# Allegro board GALVO_CTRL.brd
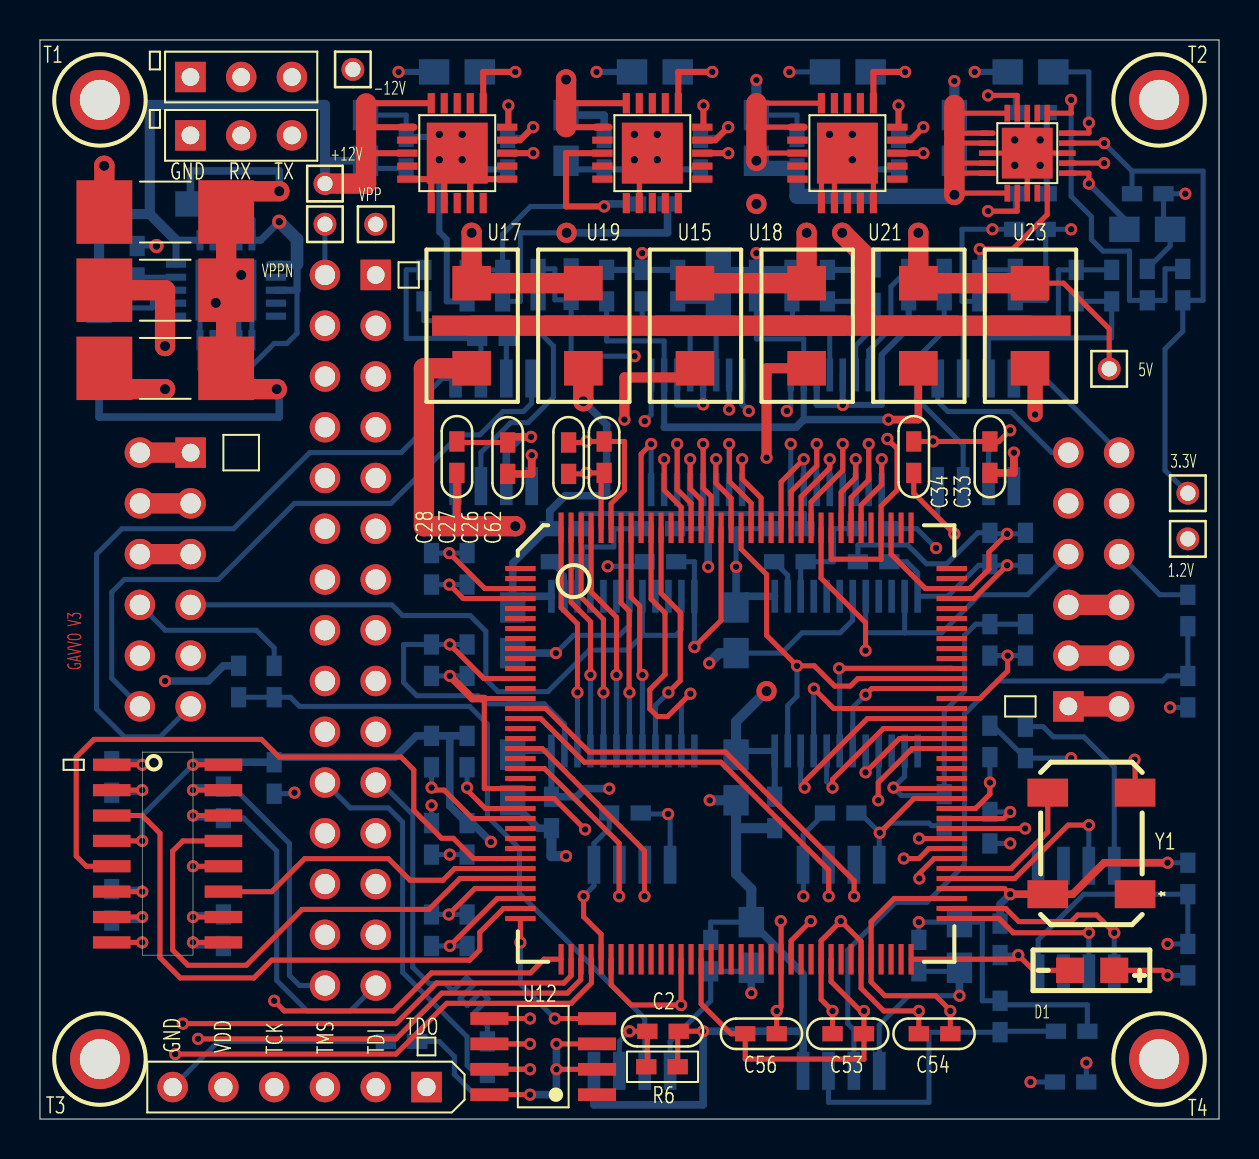
[diagram p0: board, top side]
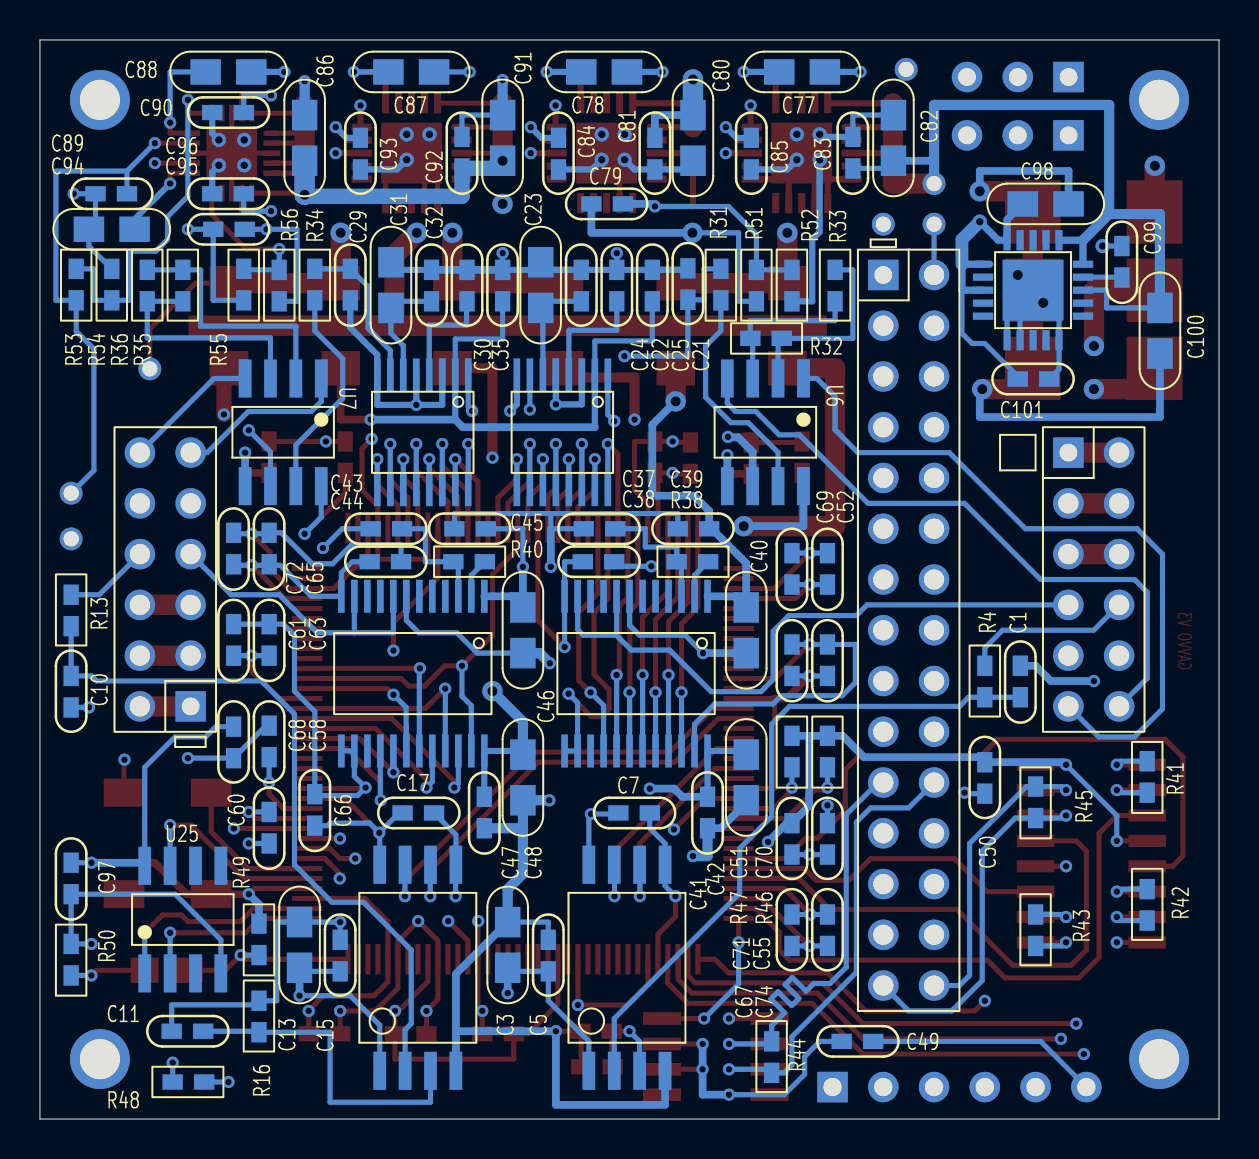
[diagram p1: board, bottom side, seen from below]

Outline 59 x 54 mm; copper layers: TOP, LAYER2, LAYER3, LAYER4, LAYER5, BOTTOM. Coordinates in mm from the lower left corner of the outline.
Outline path: 0,54 59,54 59,0 0,0 0,54

## Placement (name value [footprint] x y rotation side)
C1  220pF  [0603C]  9.94 21.11 90 bottom
C2  220pF  [0603C]  30.39 4.39 0 top
C3  10uF  [0805C]  35.6 9.85 270 bottom
C5  1nF  [0603C]  33.56 8.97 270 bottom
C7  0.1uF  [0603C]  28.48 15.32 0 bottom
C10  220pF  [0603C]  57.44 22.17 270 bottom
C11  220pF  [0603C]  50.84 4.39 0 bottom
C13  10uF  [0805C]  46.01 9.85 270 bottom
C15  1nF  [0603C]  43.98 8.97 270 bottom
C17  0.1uF  [0603C]  39.28 15.32 0 bottom
C21  220pF  [0603C]  26.58 42.57 270 bottom
C22  4.7uF  [0603C]  30.13 42.49 270 bottom
C23  10uF  [0805C]  33.94 42.87 270 bottom
C24  1uF  [0603C]  31.91 42.49 270 bottom
C25  0.1uF  [0603C]  28.36 42.49 270 bottom
C26  0.1uF  [0603C]  26.45 33.86 270 top
C27  0.1uF  [0603C]  23.4 33.86 270 top
C28  0.1uF  [0603C]  20.86 33.91 270 top
C29  220pF  [0603C]  43.47 40.97 90 bottom
C30  4.7uF  [0603C]  37.63 42.49 270 bottom
C31  10uF  [0805C]  41.44 42.87 270 bottom
C32  1uF  [0603C]  39.41 42.49 270 bottom
C33  0.1uF  [0603C]  47.53 33.91 270 top
C34  0.1uF  [0603C]  43.72 33.91 270 top
C35  0.1uF  [0603C]  35.85 42.49 270 bottom
C37  1uF  [0603C]  31.79 29.54 180 bottom
C38  0.1uF  [0603C]  30.26 27.89 0 bottom
C39  0.1uF  [0603C]  27.09 29.54 180 bottom
C40  10uF  [0805C]  23.66 23.32 90 bottom
C41  0.1uF  [0603C]  25.6 14.55 90 bottom
C42  10uF  [0805C]  23.66 15.95 90 bottom
C43  1uF  [0603C]  42.45 29.54 180 bottom
C44  0.1uF  [0603C]  40.93 27.89 0 bottom
C45  0.1uF  [0603C]  38.26 29.54 180 bottom
C46  10uF  [0805C]  34.83 23.32 90 bottom
C47  0.1uF  [0603C]  36.77 14.55 90 bottom
C48  10uF  [0805C]  34.83 15.95 90 bottom
C49  0.1uF  [0603C]  17.31 3.89 0 bottom
C50  0.1uF  [0603C]  11.72 17.86 270 bottom
C51  0.1uF  [0603C]  19.59 22.17 90 bottom
C52  0.1uF  [0603C]  19.59 26.75 90 bottom
C53  0.1uF  [0603C]  39.66 4.27 0 top
C54  0.1uF  [0603C]  43.98 4.27 0 top
C55  0.1uF  [0603C]  19.59 14.81 270 bottom
C56  0.1uF  [0603C]  36.87 4.27 180 top
C58  0.1uF  [0603C]  47.53 18.11 90 bottom
C60  0.1uF  [0603C]  47.53 13.79 90 bottom
C61  0.1uF  [0603C]  49.31 23.19 90 bottom
C62  0.1uF  [0603C]  28.23 32.33 90 top
C63  0.1uF  [0603C]  47.53 23.19 90 bottom
C65  0.1uF  [0603C]  47.53 27.76 90 bottom
C66  0.1uF  [0603C]  45.25 14.68 90 bottom
C67  0.1uF  [0603C]  21.37 10.24 270 bottom
C68  0.1uF  [0603C]  49.31 19.63 270 bottom
C69  0.1uF  [0603C]  21.37 26.75 90 bottom
C70  0.1uF  [0603C]  21.37 22.17 90 bottom
C71  0.1uF  [0603C]  21.37 14.81 270 bottom
C72  0.1uF  [0603C]  49.31 27.76 90 bottom
C74  0.1uF  [0603C]  19.59 10.24 270 bottom
C77  10uF  [0805C]  22.01 52.4 180 bottom
C78  10uF  [0805C]  31.91 52.4 180 bottom
C79  10nF  [0603C]  31.4 45.8 180 bottom
C80  47uF  [0805C]  26.32 50.24 270 bottom
C81  0.1uF  [0603C]  28.23 49.1 270 bottom
C82  47uF  [0805C]  16.29 47.95 90 bottom
C83  0.1uF  [0603C]  18.32 47.57 90 bottom
C84  1uF  [0603C]  33.06 49.1 270 bottom
C85  1uF  [0603C]  23.4 49.1 270 bottom
C86  10uF  [0805C]  45.76 47.95 90 bottom
C87  10uF  [0805C]  41.56 52.4 180 bottom
C88  47uF  [0805C]  50.71 52.4 180 bottom
C89  0.1uF  [0603C]  54.65 46.3 0 bottom
C90  1uF  [0603C]  48.8 50.37 0 bottom
C91  47uF  [0805C]  35.85 47.95 90 bottom
C92  0.1uF  [0603C]  37.88 47.57 90 bottom
C93  1uF  [0603C]  42.96 49.1 270 bottom
C94  47uF  [0805C]  54.26 44.53 0 bottom
C95  0.1uF  [0603C]  50.33 44.53 180 bottom
C96  1uF  [0603C]  48.8 46.3 0 bottom
C97  0.1uF  [0603C]  57.44 11.25 90 bottom
C98  47uF  [0805C]  9.81 45.8 180 bottom
C99  1uF  [0603C]  4.86 42.11 90 bottom
C100  10uF  [0805C]  2.96 40.59 270 bottom
C101  0.1uF  [0603C]  10.07 37.03 180 bottom
D1  LED  [SMD_LED]  53.76 7.44 180 top
J1  X_DRV_IF  [IDC12]  6.27 25.73 180 bottom
J2  Y_DRV_IF  [IDC12]  52.73 28.27 0 bottom
J3  HEADER 15X2  [IDC30]  15.53 18.11 180 bottom
J4  CON6  [SIP6]  19.34 1.6 270 top
J5  UART1  [SIP3]  10.07 52.15 90 top
J6  UART2  [SIP3]  10.07 49.22 90 top
L1  FB  [2412]  6.27 45.39 180 top
L2  FB  [2412]  6.27 41.48 180 top
L3  FB  [2412]  6.27 37.57 180 top
R4  10  [0603R]  11.72 22.68 270 bottom
R6  10  [0603R]  31.91 2.62 180 top
R13  10  [0603R]  57.44 26.24 270 bottom
R16  10  [0603R]  48.04 5.92 270 bottom
R31  100  [0603R]  24.93 40.97 90 bottom
R32  220  [0603R]  21.88 39.06 0 bottom
R33  NC  [0603R]  19.21 42.49 270 bottom
R34  100  [0603R]  45.25 40.97 90 bottom
R35  220  [0603R]  51.85 42.49 270 bottom
R36  NC  [0603R]  53.63 42.49 270 bottom
R38  100K  [0603R]  25.56 27.89 0 bottom
R40  100K  [0603R]  36.74 27.89 0 bottom
R41  100  [0603R]  3.59 16.33 90 bottom
R42  100  [0603R]  3.59 11.51 270 bottom
R43  100  [0603R]  9.18 10.24 270 bottom
R44  120  [0603R]  22.39 3.89 270 bottom
R45  100  [0603R]  9.18 15.06 90 bottom
R46  4.7K  [0603R]  19.59 17.6 90 bottom
R47  4.7K  [0603R]  21.37 17.6 90 bottom
R48  4.7K  [0603R]  52.36 1.85 180 bottom
R49  4.7K  [0603R]  48.04 8.2 90 bottom
R50  1K  [0603R]  57.44 7.19 90 bottom
R51  1.5M  [0603R]  23.15 42.49 270 bottom
R52  162K  [0603R]  21.37 42.49 270 bottom
R53  3.57K  [0603R]  57.19 40.97 90 bottom
R54  1.15K  [0603R]  55.41 40.97 90 bottom
R55  5.9K  [0603R]  48.8 40.97 90 bottom
R56  11.8K  [0603R]  47.03 42.49 270 bottom
T1  HOLE  [HOLE_D2MM]  3 51 0 top
T2  HOLE  [HOLE_D2MM]  56 51 0 top
T3  HOLE  [HOLE_D2MM]  3 3 0 top
T4  HOLE  [HOLE_D2MM]  56 3 0 top
TP1  VDDPIN  [TP]  16.8 44.78 0 top
TP2  VCCN_IN  [TP]  14.26 44.78 0 top
TP3  VAA12VP  [TP]  14.26 46.81 0 top
TP4  VCC12VN  [TP]  15.66 52.53 0 top
TP5  VDD3V3  [TP]  57.44 31.32 0 top
TP6  VCC5V  [TP]  53.5 37.54 0 top
TP7  VDD1V2  [TP]  57.44 29.03 0 top
U2  AD7403-8  [SO8_IC]  29.63 7.57 90 bottom
U3  AD7403-8  [SO8_IC]  40.09 7.57 90 bottom
U5  ADS8685IPW  [TSSOP16]  32.86 34.37 270 bottom
U6  AD8421ARZ  [SO8]  22.7 34.37 270 bottom
U7  AD8421  [SO8]  46.83 34.37 270 bottom
U8  ADS8685IPW  [TSSOP16]  39.84 34.37 270 bottom
U9  DAC7731E  [TSSOP24]  29.17 22.29 270 bottom
U10  DAC7731E  [TSSOP24]  40.34 22.29 270 bottom
U11  AM26LV32E  [SO16]  6.39 13.28 0 top
U12  MAX3485ESA  [SO8]  25.18 3.12 180 top
U13  LFXP2-8E-T144  [TQFP144]  34.83 18.79 0 top
U14  TPS7A4700  [VQFN20]  20.88 48.34 0 top
U15  ELKE103FA  [ELKE]  32.8 39.7 270 top
U16  TPS7A33  [VQFN20]  30.64 48.34 0 top
U17  ELKE103FA  [ELKE]  21.63 39.7 270 top
U18  ELKE103FA  [ELKE]  38.39 39.7 270 top
U19  ELKE103FA  [ELKE]  27.21 39.7 270 top
U20  TPS7A4700  [VQFN20]  40.4 48.34 0 top
U21  ELKE103FA  [ELKE]  43.98 39.7 270 top
U22  TPS7A88  [WQFN20]  49.4 48.34 0 top
U23  ELKE103FA  [ELKE]  49.57 39.7 270 top
U25  LM74CIM-3  [SO8]  51.85 9.98 90 bottom
U26  TPS7A4700  [VQFN20]  9.31 41.48 180 bottom
Y1  OSC4_20M  [XTAL_1]  52.61 13.79 90 top

## Library data of the parts
C1-C3 C5 C7 C10 C11 C13 C15 C17 C21-C35 C37-C48 C97 = CAP NP
C49-C56 C58 C60-C63 C65-C72 C74 C77-C96 C98-C101 = C
D1 = LED
J1 J2 = HEADER 6X2
J3 = HEADER 15X2
J4 = CON6: User Part Number: ***
J5 J6 = CON3
L1-L3 = INDUCTOR
R4 R6 R13 R16 R31-R36 R38 R40-R56 = R
T1-T4 TP1-TP7 = CON1
U2 U3 = AD7403
U5 U8 = ADS8685IPW: Tolerance: ***; User Part Number: ***
U6 U7 = AD8421
U9 U10 = DAC7731E: User Part Number: ***; Tolerance: ***
U11 = AM26C32
U12 = MAX3485ESA
U13 = LFXP2-8E-T144/TN144
U14 U20 U26 = TPS7A4700
U15 U17-U19 U21 U23 = ELKE103FA
U16 = TPS4A33
U22 = TPS7A88
U25 = LM74CIM-3
Y1 = OSC4/SM_0

## Footprints (pads in the part's own frame, mm; a bottom-side part is the same pattern mirrored in y, then rotated)
0603C
  rect 1.016x0.762 smd: 1(0,0) 2(1.575,0)
0603R
  rect 1.016x0.762 smd: 1(0,0) 2(1.575,0)
0805C
  rect 1.524x1.27 smd: 1(0,0) 2(2.286,0)
2412
  rect 2.794x3.175 smd: 1(-3.048,0) 2(3.048,0)
ELKE
  rect 1.727x1.93 smd: 1(-2.129,-0.025) 3(2.129,-0.025)
  rect 1.016x4.013 smd: 2(0,0)
HOLE_D2MM
  round 2.997 hole 2.007: 1(0,0)
IDC12
  rect 1.524x1.524 hole 0.889: 1(-1.27,7.62)
  round 1.524 hole 1.016: 2(1.27,7.62) 3(-1.27,5.08) 4(1.27,5.08) 5(-1.27,2.54) 6(1.27,2.54) 7(-1.27,0) 8(1.27,0) 9(-1.27,-2.54) 10(1.27,-2.54) 11(-1.27,-5.08) 12(1.27,-5.08)
IDC30
  rect 1.524x1.524 hole 0.889: 1(-1.27,24.13)
  round 1.524 hole 1.016: 2(1.27,24.13) 3(-1.27,21.59) 4(1.27,21.59) 5(-1.27,19.05) 6(1.27,19.05) 7(-1.27,16.51) 8(1.27,16.51) 9(-1.27,13.97) 10(1.27,13.97) 11(-1.27,11.43) 12(1.27,11.43) 13(-1.27,8.89) 14(1.27,8.89) 15(-1.27,6.35) 16(1.27,6.35) 17(-1.27,3.81) 18(1.27,3.81) 19(-1.27,1.27) 20(1.27,1.27) 21(-1.27,-1.27) 22(1.27,-1.27) 23(-1.27,-3.81) 24(1.27,-3.81) 25(-1.27,-6.35) 26(1.27,-6.35) 27(-1.27,-8.89) 28(1.27,-8.89) 29(-1.27,-11.43) 30(1.27,-11.43)
SIP3
  rect 1.524x1.524 hole 0.889: 1(0,2.54)
  round 1.524 hole 0.889: 2(0,0) 3(0,-2.54)
SIP6
  rect 1.524x1.524 hole 0.914: 1(0,0)
  round 1.524 hole 0.914: 2(0,-2.54) 3(0,-5.08) 4(0,-7.62) 5(0,-10.16) 6(0,-12.7)
SMD_LED
  rect 1.4x1.27 smd: 1(0,0) 2(2.21,0)
SO8
  rect 1.905x0.635 smd: 1(-2.692,1.905) 2(-2.692,0.635) 3(-2.692,-0.635) 4(-2.692,-1.905) 5(2.692,-1.905) 6(2.692,-0.635) 7(2.692,0.635) 8(2.692,1.905)
SO8_IC
  rect 1.905x0.635 smd: 1(-5.155,1.905) 2(-5.155,0.635) 3(-5.155,-0.635) 4(-5.155,-1.905) 5(5.155,-1.905) 6(5.155,-0.635) 7(5.155,0.635) 8(5.155,1.905)
SO16
  rect 1.88x0.61 smd: 1(-2.794,4.445) 2(-2.794,3.175) 3(-2.794,1.905) 4(-2.794,0.635) 5(-2.794,-0.635) 6(-2.794,-1.905) 7(-2.794,-3.175) 8(-2.794,-4.445) 9(2.794,-4.445) 10(2.794,-3.175) 11(2.794,-1.905) 12(2.794,-0.635) 13(2.794,0.635) 14(2.794,1.905) 15(2.794,3.175) 16(2.794,4.445)
TP
  round 1.143 hole 0.762: 1(0,0)
TQFP144
  rect 1.524x0.254 smd: 1(-10.795,8.757) 2(-10.795,8.256) 3(-10.795,7.756) 4(-10.795,7.256) 5(-10.795,6.755) 6(-10.795,6.255) 7(-10.795,5.754) 8(-10.795,5.254) 9(-10.795,4.754) 10(-10.795,4.253) 11(-10.795,3.753) 12(-10.795,3.252) 13(-10.795,2.752) 14(-10.795,2.252) 15(-10.795,1.751) 16(-10.795,1.251) 17(-10.795,0.751) 18(-10.795,0.25) 19(-10.795,-0.25) 20(-10.795,-0.751) 21(-10.795,-1.251) 22(-10.795,-1.751) 23(-10.795,-2.252) 24(-10.795,-2.752) 25(-10.795,-3.252) 26(-10.795,-3.753) 27(-10.795,-4.253) 28(-10.795,-4.754) 29(-10.795,-5.254) 30(-10.795,-5.754) 31(-10.795,-6.255) 32(-10.795,-6.755) 33(-10.795,-7.256) 34(-10.795,-7.756) 35(-10.795,-8.256) 36(-10.795,-8.757) 73(10.795,-8.757) 74(10.795,-8.256) 75(10.795,-7.756) 76(10.795,-7.256) 77(10.795,-6.755) 78(10.795,-6.255) 79(10.795,-5.754) 80(10.795,-5.254) 81(10.795,-4.754) 82(10.795,-4.253) 83(10.795,-3.753) 84(10.795,-3.252) 85(10.795,-2.752) 86(10.795,-2.252) 87(10.795,-1.751) 88(10.795,-1.251) 89(10.795,-0.751) 90(10.795,-0.25) 91(10.795,0.25) 92(10.795,0.751) 93(10.795,1.251) 94(10.795,1.751) 95(10.795,2.252) 96(10.795,2.752) 97(10.795,3.252) 98(10.795,3.753) 99(10.795,4.253) 100(10.795,4.754) 101(10.795,5.254) 102(10.795,5.754) 103(10.795,6.255) 104(10.795,6.755) 105(10.795,7.256) 106(10.795,7.756) 107(10.795,8.256) 108(10.795,8.757)
  rect 0.254x1.524 smd: 37(-8.757,-10.795) 38(-8.256,-10.795) 39(-7.756,-10.795) 40(-7.256,-10.795) 41(-6.755,-10.795) 42(-6.255,-10.795) 43(-5.754,-10.795) 44(-5.254,-10.795) 45(-4.754,-10.795) 46(-4.253,-10.795) 47(-3.753,-10.795) 48(-3.252,-10.795) 49(-2.752,-10.795) 50(-2.252,-10.795) 51(-1.751,-10.795) 52(-1.251,-10.795) 53(-0.751,-10.795) 54(-0.25,-10.795) 55(0.25,-10.795) 56(0.751,-10.795) 57(1.251,-10.795) 58(1.751,-10.795) 59(2.252,-10.795) 60(2.752,-10.795) 61(3.252,-10.795) 62(3.753,-10.795) 63(4.253,-10.795) 64(4.754,-10.795) 65(5.254,-10.795) 66(5.754,-10.795) 67(6.255,-10.795) 68(6.755,-10.795) 69(7.256,-10.795) 70(7.756,-10.795) 71(8.256,-10.795) 72(8.757,-10.795) 109(8.757,10.795) 110(8.256,10.795) 111(7.756,10.795) 112(7.256,10.795) 113(6.755,10.795) 114(6.255,10.795) 115(5.754,10.795) 116(5.254,10.795) 117(4.754,10.795) 118(4.253,10.795) 119(3.753,10.795) 120(3.252,10.795) 121(2.752,10.795) 122(2.252,10.795) 123(1.751,10.795) 124(1.251,10.795) 125(0.751,10.795) 126(0.25,10.795) 127(-0.25,10.795) 128(-0.751,10.795) 129(-1.251,10.795) 130(-1.751,10.795) 131(-2.252,10.795) 132(-2.752,10.795) 133(-3.252,10.795) 134(-3.753,10.795) 135(-4.253,10.795) 136(-4.754,10.795) 137(-5.254,10.795) 138(-5.754,10.795) 139(-6.255,10.795) 140(-6.755,10.795) 141(-7.256,10.795) 142(-7.756,10.795) 143(-8.256,10.795) 144(-8.757,10.795)
TSSOP16
  rect 1.651x0.33 smd: 1(-2.87,2.276) 2(-2.87,1.626) 3(-2.87,0.975) 4(-2.87,0.325) 5(-2.87,-0.325) 6(-2.87,-0.975) 7(-2.87,-1.626) 8(-2.87,-2.276) 9(2.87,-2.276) 10(2.87,-1.626) 11(2.87,-0.975) 12(2.87,-0.325) 13(2.87,0.325) 14(2.87,0.975) 15(2.87,1.626) 16(2.87,2.276)
TSSOP24
  rect 1.651x0.33 smd: 1(-3.87,3.576) 2(-3.87,2.926) 3(-3.87,2.276) 4(-3.87,1.626) 5(-3.87,0.975) 6(-3.87,0.325) 7(-3.87,-0.325) 8(-3.87,-0.975) 9(-3.87,-1.626) 10(-3.87,-2.276) 11(-3.87,-2.926) 12(-3.87,-3.576) 13(3.87,-3.576) 14(3.87,-2.926) 15(3.87,-2.276) 16(3.87,-1.626) 17(3.87,-0.975) 18(3.87,-0.325) 19(3.87,0.325) 20(3.87,0.975) 21(3.87,1.626) 22(3.87,2.276) 23(3.87,2.926) 24(3.87,3.576)
VQFN20
  oval 1.016x0.356 smd: 1(-2.5,1.3)
  rect 1.016x0.356 smd: 2(-2.5,0.65) 3(-2.5,0) 4(-2.5,-0.65) 5(-2.5,-1.3) 11(2.5,-1.3) 12(2.5,-0.65) 13(2.5,0) 14(2.5,0.65) 15(2.5,1.3)
  rect 0.356x1.016 smd: 6(-1.3,-2.5) 7(-0.65,-2.5) 8(0,-2.5) 9(0.65,-2.5) 10(1.3,-2.5) 16(1.3,2.5) 17(0.65,2.5) 18(0,2.5) 19(-0.65,2.5) 20(-1.3,2.5)
  rect 3.048x3.048 smd: 21(0,0)
WQFN20
  oval 0.838x0.279 smd: 1(-2,1)
  rect 0.838x0.279 smd: 2(-2,0.5) 3(-2,0) 4(-2,-0.5) 5(-2,-1) 11(2,-1) 12(2,-0.5) 13(2,0) 14(2,0.5) 15(2,1)
  rect 0.279x0.838 smd: 6(-1,-2) 7(-0.5,-2) 8(0,-2) 9(0.5,-2) 10(1,-2) 16(1,2) 17(0.5,2) 18(0,2) 19(-0.5,2) 20(-1,2)
  rect 2.54x2.54 smd: 21(0,0)
XTAL_1
  rect 1.397x2.032 smd: 1(-2.54,-2.184) 2(2.54,-2.184) 3(2.54,2.184) 4(-2.54,2.184)

## Nets
AGND: C21.1 C22.1 C23.1 C24.1 C25.1 C27.1 C28.1 C29.1 C30.1 C31.1 C32.1 C33.1 C34.1 C35.1 J1.10 J2.10 L3.2 U5.3(AGND) U5.5(REFGND) U5.8(AIN_GND) U6.6(REF) U7.6(REF) U8.3(AGND) U8.5(REFGND) U8.8(AIN_GND)
DGND: C7.1 C17.1 C26.1 C38.1 C44.1 C49.1 C50.2 C51.2 C52.2 C53.2 C54.2 C55.2 C56.2 C58.2 C60.1 C61.2 C62.2 C63.2 C65.2 C66.2 C67.2 C68.2 C69.2 C70.2 C71.2 C72.2 C74.2 C86.2 C88.2 C89.2 C90.2 C94.2 C95.2 C96.2 C97.1 J4.6 J5.1 J6.1 L2.2 R48.1 R50.2 R54.2 R56.2 U2.5(GND2) U3.5(GND2) U5.1(DGND) U8.1(DGND) U9.13(DGND) U9.14(TEST) U9.23(R\E\F\E\N\) U10.13(DGND) U10.14(TEST) U10.23(R\E\F\E\N\) U11.8(GND) U11.12(G\) U12.5(GND) U13.3(GNDIO7_1) U13.12(GNDIO7_2) U13.34(GNDIO6) U13.41(GNDIO5_1) U13.51(GNDIO5_2) U13.64(GNDIO4) U13.68(LRC_GNDPLL) U13.75(GNDIO3) U13.86(GND) U13.97(GNDIO2_1) U13.106(GNDIO2_2) U13.111(GNDIO1) U13.126(GNDIO0_1) U13.135(GNDIO0_2) U13.139(ULC_GNDPLL) U22.3(GND1) U22.8(SS_CTRL2) U22.13(GND2) U22.18(SS/CTRL1) U22.21(TPAD) U25.4(GND) Y1.2(GND)
GND: C77.2 C78.2 C80.2 C81.2 C82.2 C83.2 C84.2 C85.2 C87.2 C91.2 C92.2 C93.2 C98.2 C99.2 C100.2 C101.2 J3.7 J3.8 J3.9 J3.10 J3.11 J3.12 J3.13 J3.14 L1.1 L2.1 L3.1 R52.2 U14.5(6P4V1) U14.6(3P2V) U14.7(GND) U14.9(0P8V) U14.11(0P2V) U14.21(TPAD) U15.2 U16.7(GND) U16.21(TPAD) U17.2 U18.2 U19.2 U20.6(3P2V) U20.7(GND) U20.10(0P4V) U20.21(TPAD) U21.2 U23.2 U26.6(3P2V) U26.7(GND) U26.10(0P4V) U26.21(TPAD)
PGND: C1.2 C2.2 C3.1 C5.1 C10.2 C11.2 C13.1 C15.1 C37.1 C39.1 C40.1 C41.1 C42.1 C43.1 C45.1 C46.1 C47.1 C48.1 J1.3 J1.4 J2.3 J2.4 L1.2 R6.1 R16.1 U2.4(GND1) U3.4(GND1) U9.7(AGND) U10.7(AGND)
VCC5V: C98.1 C101.1 TP6.1 U21.1 U23.1 U26.1(OUT1) U26.3(SENSE/FB) U26.20(OUT2)
VCC12V: C82.1 C83.1 C87.1 C100.1 TP3.1 U14.1(OUT1) U14.3(SENSE/FB) U14.20(OUT2) U17.1 U19.1 U20.13(EN) U20.15(IN1) U20.16(IN2) U26.13(EN) U26.15(IN1) U26.16(IN2)
VCC12VN: C79.1 C80.1 C81.1 R51.2 TP4.1 U15.1 U16.1(OUT1) U16.20(OUT2) U18.1
VDD1V2: C55.1 C56.1 C58.1 C94.1 C95.1 R55.1 TP7.1 U13.24(VCC_2) U13.59(VCC_3) U13.84(VCC_4) U13.118(VCC_1) U22.11(OUT2_1) U22.12(OUT2_2)
VDD3V3: C7.2 C17.2 C26.2 C38.2 C44.2 C49.2 C50.1 C51.1 C52.1 C53.1 C54.1 C60.2 C61.1 C62.1 C63.1 C65.1 C66.1 C67.1 C68.1 C69.1 C70.1 C71.1 C72.1 C74.1 C88.1 C89.1 C97.2 J4.5 R46.2 R47.2 R49.2 R53.1 TP5.1 U2.8(VDD2) U3.8(VDD2) U5.16(DVDD) U8.16(DVDD) U9.12(VDD) U10.12(VDD) U11.4(G) U11.16(VCC) U12.2(R\E\) U12.3(DE) U12.8(VCC) U13.4(VCCIO7_1) U13.14(VCCIO7_2) U13.23(VCCAUX_1) U13.33(VCCIO6) U13.42(VCCIO5_1) U13.49(VCCIO5_2) U13.60(VCCAUX_2) U13.63(VCCIO4) U13.67(LRC_VCCPLL) U13.76(VCCIO3) U13.83(VCCJ) U13.85(VCCAUX_3) U13.95(VCCIO2_1) U13.105(VCCIO2_2) U13.112(VCCIO1) U13.117(VCCAUX_4) U13.128(VCCIO0_1) U13.136(VCCIO0_2) U13.140(ULC_VCCPLL) U22.14(OUT1_1) U22.15(OUT1_2) U25.8(VCC) Y1.4(VCC)
VDD5V: C86.1 C91.1 C92.1 U20.1(OUT1) U20.3(SENSE/FB) U20.20(OUT2) U22.1(IN1_1) U22.2(IN1_2) U22.4(IN2_1) U22.5(IN2_2) U22.6(EN2) U22.20(EN1)
CFG0: R46.1 U13.26(CFG0)
CLK_20M: U13.78(PR18A) Y1.3(OUT)
DONE: D1.2(ANODE) R49.1 U13.72(PB32B)
FPGA_RX1: J5.2 U13.38(PB2A)
FPGA_RX2: J6.2 U13.40(PB2B)
FPGA_TX1: J5.3 U13.37(PB3A)
FPGA_TX2: J6.3 U13.39(PB3B)
JTAG_TCK: J4.4 U13.81(TCK)
JTAG_TDI: J4.2 U13.80(TDI)
JTAG_TDO: J4.1 U13.82(TDO)
JTAG_TMS: J4.3 R48.2 U13.79(TMS)
TEMP_CS: U13.77(PR18B) U25.7(C\S\)
TEMP_DATA: U13.74(PR30B) U25.1(SI/O)
TEMP_SCK: U13.73(PR30A) U25.2(SCK)
TOE: R47.1 U13.25(TOE)
VAA5V: C25.2 C35.2 U5.2(AVDD) U8.2(AVDD) U21.3
VAA12VN: C27.2 C33.2 U6.5(V-) U7.5(V-) U15.3
VAA12VP: C28.2 C34.2 J1.9 J2.9 U6.8(V+) U7.8(V+) U17.3
VPP: C77.1 J1.1 J1.2 J2.1 J2.2 J3.15 J3.16 J3.17 J3.18 J3.19 J3.20 TP1.1 U14.13(EN) U14.15(IN1) U14.16(IN2)
VPP5V: C3.2 C5.2 C13.2 C15.2 U2.1(VDD1) U3.1(VDD1) U23.3
VPP12VN: C41.2 C42.2 C47.2 C48.2 U9.24(VSS) U10.24(VSS) U18.3
VPP12VP: C39.2 C40.2 C45.2 C46.2 U9.1(VCC) U10.1(VCC) U19.3
VPPN: C78.1 J1.5 J1.6 J2.5 J2.6 J3.1 J3.2 J3.3 J3.4 J3.5 J3.6 TP2.1 U16.13(EN) U16.15(IN1) U16.16(IN2)
X_POS: R31.1 U6.7(OUT)
X_POS1: J1.11 U6.1(IN-)
X_POS2: J1.12 U6.4(IN+)
XCUR_SAMP: J1.8 R4.1
XDAC_CS: U9.20(C\S\) U13.142(PT3B)
XDAC_LDAC: U9.17(LDAC) U13.137(PT4B)
XDAC_RST: U9.16(R\S\T\) U13.134(PT13A)
XDAC_RSTSEL: U9.22(RSTSEL) U13.144(PT3A)
XDAC_SCK: U9.21(SCLK) U13.143(PT2A)
XDAC_SDI: U9.18(SDI) U13.138(PT4A)
XDAC_SDO: U9.19(SDO) U13.141(PT2B)
XIADC_CLKIN: U2.7(MCLKIN) U13.19(PL15A)
XIADC_MDAT: U2.6(MDAT) U13.21(PL16A)
XMOTOR_DRV: J1.7 U9.8(RFB2) U9.11(VOUT)
XPADC_CS: U5.11(CONVST/C\S\) U13.127(PT16A)
XPADC_RST: U5.9(R\S\T\) U13.124(PT17A)
XPADC_RVS: U5.15(RVS) U13.132(PT14A)
XPADC_SCK: U5.12(SCLK) U13.129(PT15B)
XPADC_SDI: U5.10(SDI) U13.125(PT16B)
XPADC_SDO0: U5.13(SDO-0) U13.130(PT14B)
XPADC_SDO1: U5.14(ALARM/SDO-1/GPO) U13.131(PT15A)
XY_CLK: U11.13(4Y) U13.32(PL20A)
XY_CLK+: J3.29 R45.1 U11.14(4A)
XY_CLK-: J3.30 R45.2 U11.15(4B)
XY_STATUS: U12.4(DI) U13.36(PL32B)
XY_STATUS+: J3.21 R44.1 U12.6(A)
XY_STATUS-: J3.22 R44.2 U12.7(B)
XY_SYNC: U11.3(1Y) U13.35(PL32A)
XY_SYNC+: J3.27 R41.1 U11.2(1A)
XY_SYNC-: J3.28 R41.2 U11.1(1B)
XY_X: U11.5(2Y) U13.30(PL18B)
XY_X+: J3.25 R42.1 U11.6(2A)
XY_X-: J3.26 R42.2 U11.7(2B)
XY_Y: U11.11(3Y) U13.31(PL20B)
XY_Y+: J3.23 R43.1 U11.10(3A)
XY_Y-: J3.24 R43.2 U11.9(3B)
Y_POS: R34.1 U7.7(OUT)
Y_POS1: J2.11 U7.1(IN-)
Y_POS2: J2.12 U7.4(IN+)
YCUR_SAMP: J2.8 R13.1
YDAC_CS: U10.20(C\S\) U13.92(PR13B)
YDAC_LDAC: U10.17(LDAC) U13.91(PR14B)
YDAC_RST: U10.16(R\S\T\) U13.90(PR15A)
YDAC_RSTSEL: U10.22(RSTSEL) U13.93(PR14A)
YDAC_SCK: U10.21(SCLK) U13.94(PR13A)
YDAC_SDI: U10.18(SDI) U13.96(PR12B)
YDAC_SDO: U10.19(SDO) U13.98(PR12A)
YIADC_CLKIN: U3.7(MCLKIN) U13.15(PL13A)
YIADC_MDAT: U3.6(MDAT) U13.16(PL14A)
YMOTOR_DRV: J2.7 U10.8(RFB2) U10.11(VOUT)
YPADC_CS: U8.11(CONVST/C\S\) U13.116(PT20A)
YPADC_RST: U8.9(R\S\T\) U13.114(PT20B)
YPADC_RVS: U8.15(RVS) U13.122(PT17B)
YPADC_SCK: U8.12(SCLK) U13.119(PT19B)
YPADC_SDI: U8.10(SDI) U13.115(PT21A)
YPADC_SDO0: U8.13(SDO-0) U13.120(PT19A)
YPADC_SDO1: U8.14(ALARM/SDO-1/GPO) U13.121(PT18B)
N47571: R32.2 R33.2 U6.3(RG2)
N47575: R32.1 R33.1 U6.2(RG1)
N54378: R35.1 R36.1 U7.2(RG1)
N54390: R35.2 R36.2 U7.3(RG2)
N83156: D1.1(CATHODE) R50.1
N85781: C85.1 U14.14(NR)
N87301: C84.1 U16.14(NR/SS)
N88678: C93.1 U20.14(NR)
N92846: C79.2 R51.1 R52.1 U16.3(FB)
N94657: C96.1 U22.7(NR/SS2)
N94699: C90.1 U22.19(NR/SS1)
N95108: R53.2 R54.1 U22.16(FB1)
N95843: R55.2 R56.1 U22.10(FB2)
N118699: C22.2 U5.4(REFIO)
N118768: C23.2 C24.2 U5.6(REFCAP)
N119366: C21.2 R31.2 U5.7(AIN_P)
N119636: C30.2 U8.4(REFIO)
N119668: C31.2 C32.2 U8.6(REFCAP)
N121391: C37.2 R38.2 U9.3(REFIN)
N121395: R38.1 U9.2(REFOUT)
N122026: C43.2 R40.2 U10.3(REFIN)
N122030: R40.1 U10.2(REFOUT)
N154705: C2.1 R6.2 U2.3(VIN-)
N154709: C1.1 R4.2 U2.2(VIN+)
N156213: C10.1 R13.2 U3.2(VIN+)
N156217: C11.1 R16.2 U3.3(VIN-)
N192854: C29.2 R34.2 U8.7(AIN_P)
N211826: C99.1 U26.14(NR)

Pads without a net: T1 1; T2 1; T3 1; T4 1; U9 4 5 6 9 10 15; U10 4 5 6 9 10 15; U12 1; U13 1 2 5 6 7 8 9 10 11 13 17 18 20 22 27 28 29 43 44 45 46 47 48 50 52 53 54 55 56 57 58 61 62 65 66 69 70 71 87 88 89 99 100 101 102 103 104 107 108 109 110 113 123 133; U14 2 4 8 10 12 17 18 19; U16 2 4 5 6 8 9 10 11 12 17 18 19; U20 2 4 5 8 9 11 12 17 18 19; U22 9 17; U25 3 5 6; U26 2 4 5 8 9 11 12 17 18 19; Y1 1

## Via types
v1: diameter 0.61, hole 0.33, TOP to BOTTOM, 179 vias
v2: diameter 1.016, hole 0.508, TOP to BOTTOM, 19 vias
v3: diameter 0.711, hole 0.381, TOP to BOTTOM, 17 vias

## Routing (per net, layer and track width the routed paths; a pad name or vN(x,y) marks a point on that pad's centre or on a via; arc(x,y) is an arc through that point)
AGND: length 172.5
  TOP w0.254: v1(48.55,34.47) 47.99,33.91 C33.1 v1(44.69,33.91) C34.1 ; C28.1 20.91,33.86 C27.1
  TOP w0.381: C27.1 23.4,34.14 v1(24.57,34.14)
  TOP w1.016: L3.2 4.26,36.52 v2(6.26,36.52)
  LAYER2 w0.305: 40.17,37.11 40.17,37.11 v1(40.17,35.74) ; v1(35.47,35.43) 35.47,37.11
  LAYER2 w0.381: 33.18,37.11 33.19,37.11 v1(33.19,35.76) ; 42.12,37.06 42.07,37.11
  LAYER2 w0.508: 35.85,37.11 44.69,37.11 ; 35.85,37.11 26.96,37.11 ; 35.85,37.11 v1(35.85,43.33) ; 26.96,37.11 26.96,39.06 30.13,39.06 v1(30.13,43.33) ; 26.96,37.11 24.57,37.11 v1(24.57,34.14) ; 44.69,37.11 v1(44.69,33.91) ; 44.69,37.11 50.25,37.11 51.72,35.64 54.65,35.64 55.92,34.37 55.92,32.73 J2.10
  LAYER3 w1.016: J1.10 2.45,23.19 2.45,36.52 v2(6.26,36.52)
  LAYER5 w0.762: v1(24.57,34.14) 18.7,34.14 18.7,43.64 12.23,43.64 12.23,39.06 8.8,39.06 8.8,36.52
  LAYER5 w1.016: 8.8,36.52 v2(6.26,36.52)
  BOTTOM w0.254: v1(48.55,34.47) 47.46,33.38 U7.6 ; C35.1 v1(35.85,43.33) ; C22.1 v1(30.13,43.33)
  BOTTOM w0.305: U5.5 v1(33.19,35.76) 31.88,35.76 U5.3 ; U8.3 38.87,35.74 v1(40.17,35.74) ; C32.1 41.06,42.49 C31.1 ; v1(35.47,35.43) 35.14,35.77 U5.8 ; v1(40.17,35.74) U8.5 ; v1(40.17,35.74) 42.12,35.74 U8.8 42.12,38.25 43.47,39.6 C29.1 ; C35.1 33.94,42.49 ; 33.94,42.49 C23.1 33.56,42.49 C24.1 C22.1 C25.1 ; 33.94,42.49 33.94,42.37 ; C25.1 26.58,42.49 C21.1 ; C25.1 28.36,42.57
  BOTTOM w0.381: C32.1 C30.1 C35.1 ; U6.6 23.33,33.38 24.06,34.11 24.55,34.11 v1(24.57,34.14)
DGND: length 410.4
  TOP w0.254: U22.13 U22.21 ; U22.21 U22.3 ; U22.21 U22.8 ; U22.21 49.4,48.37 ; U13.51 33.08,5.76 34.58,4.27 C56.2 35.29,3 41.23,3 C53.2 v1(41.23,5.41) 41.06,5.41 39.59,6.88 U13.64 ; 49.4,48.37 v3(48.78,49) ; 49.4,48.37 U22.18 ; v1(27.2,11.15) 27.2,10.12 28.08,9.24 U13.41 ; 45.63,11.04 42.75,11.04 41.59,9.88 U13.68 41.59,6.86 42.28,6.17 44.82,6.17 45.55,5.44 v1(45.55,5.41) C54.2 ; U13.111 42.59,28.26 44.3,26.55 46.52,26.55 47.48,27.51 47.48,28.37 v1(48.4,29.29) ; U11.8 v1(5.12,8.84) ; U13.126 35.08,28.53 36.36,27.25 36.36,24.21 v1(37.88,22.68) 38.75,22.68 39.76,21.67 40.55,21.67 40.93,22.04 45.63,22.04 ; U13.12 22.21,22.04 v1(20.51,23.75) ; U13.34 22.88,11.04 v1(20.51,8.66) ; v1(32.55,21.28) 31.4,20.14 30.9,20.14 30.52,20.52 30.52,21.49 31.28,22.25 31.28,25.32 30.58,26.02 U13.135 ; 45.63,16.54 42.75,16.54 v1(42.71,16.59) ; U12.5 v1(24.52,5.03) ; C26.1 27.29,33.86 v1(27.34,33.91) C62.2 29.25,33.91 29.25,31.47 28.58,30.8 U13.139 ; U11.12 v1(7.66,12.65) ; v1(20.48,28.32) 22.26,26.55 U13.3 ; Y1.2 54.8,17.96 v1(54.77,17.98)
  TOP w1.016: v2(6.26,38.68) 6.26,41.48 L2.2
  LAYER4 w0.254: v1(37.37,35.43) 36.56,34.62 30.57,34.62 v1(30.26,34.92)
  LAYER5 w0.381: v1(30.26,34.92) 29.5,34.16
  LAYER5 w0.508: J4.6 5.5,2.74 5.5,6.04 5.12,6.43 v1(5.12,8.84) ; v1(12.74,16.33) 12.74,12.65 v1(7.66,12.65) 1.31,12.65 ; v1(37.88,22.68) 34.83,22.68 34.83,21.41 ; v1(20.51,8.66) 20.51,6.93 ; v1(45.55,5.41) 44.99,5.41 44.99,10.74 ; v1(28.41,27.66) 28.41,28.73 ; v1(20.48,28.32) 26.45,28.32 ; v1(56.42,8.76) 56.42,11.25 ; v1(20.51,23.75) 24.17,23.75 24.17,21.16 ; v1(41.23,5.41) 42.2,5.41 42.2,11.25 ; v1(52.36,2.82) 50.58,2.82 50.58,10.74 ; v1(20.51,13.23) 20.51,12.27 23.4,12.27 ; v1(24.52,5.03) 24.52,6.91 24.55,6.93
  LAYER5 w0.762: v2(6.26,38.68) 6.26,41.1 7.53,42.37 J6.1 J5.1
  LAYER5 w2.032: v2(6.26,38.68) 1.31,38.68 1.31,6.43 9.81,6.43 9.81,3.89 20.36,3.89 20.36,6.93 27.2,6.93 v1(27.2,11.15)
  BOTTOM w0.254: v1(27.2,11.15) 27.72,11.67 U2.5 27.72,13.79 28.48,14.55 C7.1 ; v1(57.31,46.3) C89.2 56.22,44.86 C94.2 56.55,43.69 R54.2 ; C55.2 v1(20.51,13.23) C71.2 ; U10.13 U10.14 43.27,17.15 v1(42.71,16.59) 43.1,16.19 45.18,16.19 C66.2 45.25,20.4 46.26,21.41 46.26,24.21 46.82,24.76 C63.2 C61.2 ; U8.1 37.57,35.63 v1(37.37,35.43) ; C70.2 v1(20.51,23.75) C51.2 18.2,23.75 18.2,21.84 18.86,21.18 21.91,21.18 22.31,20.78 25.23,20.78 26.25,19.76 U9.23 ; C49.1 8.93,3.89 J4.6 ; U25.4 49.95,8.97 52.23,11.25 C97.1 R50.2 v1(56.42,8.76) ; C58.2 47.69,19.68 C68.2 v1(51.6,18.06) ; R48.1 v1(52.36,2.82) ; v1(28.41,27.66) 30.26,27.66 C38.1 ; C95.2 v1(47.66,44.53) 46.14,44.53 46.14,40.92 R56.2 ; C50.2 12.69,16.28 v1(12.74,16.33) ; v1(30.26,34.92) 30.58,35.25 U5.1 ; C17.1 38.19,14.22 U3.5 38.2,12.71 v1(38.2,11.15) ; C69.2 v1(20.48,28.32) C52.2 ; C72.2 49.31,29.29 v1(48.4,29.29) 47.53,29.29 C65.2 46.92,29.34 45.37,27.79 44.36,27.79 43.42,28.73 40.93,28.73 C44.1 ; U10.23 37.42,20.69 37.88,21.16 v1(37.88,22.68) ; v1(32.55,21.28) 32.1,20.83 U9.14 U9.13 ; C60.1 v1(48.55,13.79) ; C67.2 v1(20.51,8.66) C74.2
  BOTTOM w0.305: v3(50.05,49) 50.38,49.33 C90.2 ; v3(50.05,47.73) 50.38,47.4 C96.2 ; C88.2 v1(46.77,52.4)
  BOTTOM w0.508: C86.2 v1(45.76,51.94)
  vias: v3(48.78,47.73)
GND: length 203.1
  TOP w0.254: U20.10 41.7,47.04 U20.21 39.75,47.69 ; U16.7 29.99,47.11 v3(30.89,48.01) ; 39.75,47.69 39.1,47.04 U20.6 ; 39.75,47.69 U20.7
  TOP w0.305: U14.9 21.53,48.01 v3(21.13,48.01) 21.13,47.04 U14.11 ; v3(30.89,49.28) 30.89,48.34 U16.21 29.75,48.34 ; v3(19.98,48.01) 19.98,47.04 U14.5 ; v3(19.98,48.01) 20.23,48.01 U14.7 ; v3(19.98,48.01) 19.58,48.01 U14.6 ; v3(21.13,49.28) v3(19.98,49.28) ; 29.75,48.34 v3(29.75,48.01) ; 29.75,48.34 v3(29.75,49.28)
  TOP w1.016: 41.26,39.7 41.26,43.23 v2(40.14,44.35) ; 41.26,39.7 U18.2 U15.2 U19.2 U17.2 ; 41.26,39.7 U21.2 U23.2 ; v2(11.85,36.52) 10.33,36.52 9.32,37.54 L3.1 L2.1 L1.1 9.32,45.41 10.33,46.43 v2(11.97,46.43)
  LAYER2 w0.635: 14.26,33.48 J3.8 14.26,35.76 ; 14.26,30.94 J3.10 14.26,33.22 ; 16.8,28.14 J3.13 16.8,25.86 ; 14.26,30.68 J3.12 14.26,28.4 ; 16.8,33.48 J3.7 16.8,35.76 ; 14.26,25.86 J3.14 14.26,28.14 ; 16.8,28.4 J3.11 16.8,30.68 ; 16.8,33.22 J3.9 16.8,30.94
  LAYER2 w1.524: 12.61,27 J3.14 J3.13 17.94,27 ; 17.94,29.54 J3.11 J3.12 12.48,29.54 ; 17.94,32.08 J3.9 J3.10 12.35,32.08 ; 12.23,34.62 J3.8 J3.7 17.94,34.62
  LAYER3 w0.254: v3(5.83,43.69) 9.23,43.69 v2(11.97,46.43)
  LAYER5 w1.016: J3.12 J3.11 ; J3.14 J3.13 ; J3.10 J3.9 ; J3.8 J3.7
  BOTTOM w0.254: C91.2 37.88,50.24 C92.2 ; U26.6 10.61,41.48 10.07,41.48 ; 9.96,41.48 U26.7 ; C82.2 18.32,50.24 C83.2 ; C87.2 v1(37.5,52.4) ; C99.2 v3(5.83,43.69) ; C101.2 8.01,37.52 U26.10 8.01,41.48 8.8,41.48
  BOTTOM w0.305: v3(40.65,48.01) 41.13,47.52 C93.2 ; v3(29.75,48.01) 29.26,47.52 C81.2 26.32,47.52 C80.2 ; v3(19.98,48.01) 19.98,44.39 20.36,44.02 20.36,40.92 R52.2 ; v3(30.89,48.01) 31.37,47.52 C84.2 ; C77.2 v1(17.94,52.4) ; v3(19.98,49.28) 19.86,49.15 C83.2 ; 29.63,52.4 v1(27.85,52.4) ; C85.2 21.61,47.52 v3(21.13,48.01)
  BOTTOM w0.381: 9.96,41.48 U26.21 8.8,41.48 v2(8.8,40.84) ; v2(10.07,42.24) 10.07,41.48 ; C98.2 7.53,47.45 11.97,47.45 v2(11.97,46.43) ; v2(11.85,36.52) 11.97,36.4 11.97,35.13 2.96,35.13 C100.2
  BOTTOM w0.508: C91.2 v1(35.85,51.99)
  vias: v3(39.51,49.28) v3(40.65,49.28)
PGND: length 274.5
  TOP w0.254: v1(33.18,4.39) C2.2 31.91,4.34 R6.1
  TOP w1.016: v2(3.21,47.7) 3.22,47.69 L1.2 ; J1.4 J1.3 ; J2.3 J2.4
  LAYER2 w0.381: v1(56.55,20.6) 55.48,20.6 ; 44.84,20.17 45.37,19.63 45.37,9.85 v1(43.98,9.85) ; 44.84,20.17 44.84,19.61 44.69,19.46 ; 44.84,20.17 v1(44.84,28.57) ; v1(6.26,21.92) 1.31,21.92
  LAYER2 w0.508: v1(25.82,23.32) 25.82,19.63 ; v1(33.51,15.95) 33.51,19.63 ; v1(33.44,27.63) 34.07,27 34.07,23.39 v1(33.49,22.81) 33.49,19.63 ; v1(26.32,13.16) 24.55,13.16
  LAYER2 w0.635: 55.14,23.19 J2.4 54,22.05
  LAYER2 w1.524: 1.31,30.81 J1.4 J1.3 ; J2.4 J2.3 50.84,23.19
  LAYER2 w2.032: 47.79,19.63 24.55,19.63 24.55,11.76 22.26,11.76 22.26,3.89 9.81,3.89 9.81,6.55 1.31,6.55 1.31,45.8 v2(3.21,47.7)
  LAYER5 w1.016: J1.4 J1.3
  BOTTOM w0.254: C45.1 38.26,30.3 33.44,30.3 ; C43.1 43.88,29.54 v1(44.84,28.57) ; C15.1 v1(43.98,9.85) C13.1 47.15,9.85 47.15,5.92 R16.1 48.04,5.71 52.41,5.71 C11.2 ; C37.1 33.44,29.54 33.44,30.3 ; 33.44,30.3 27.09,30.3 C39.1 ; C3.1 33.56,9.85 C5.1 ; v1(25.82,23.32) 26.71,24.21 28.99,24.21 29.5,24.71 U9.7 ; U10.7 40.67,24.96 40.04,24.33 38.14,24.33 37.12,23.32 C46.1 ; C10.2 v1(56.55,20.6)
  BOTTOM w0.381: C41.1 24.93,14.55 23.66,15.82 C42.1 ; U2.4 27.72,0.71 33.18,0.71 v1(33.18,4.39) 38.19,4.39 ; C40.1 v1(25.82,23.32) ; 38.19,4.39 U3.4 ; 38.19,4.39 38.19,7.26 C3.1 ; v1(6.26,21.92) 8.42,21.92 9.18,22.68 C1.2 ; v1(33.44,27.63) 33.44,29.54
  BOTTOM w0.508: v1(33.51,15.95) C48.1 34.83,14.55 ; C41.1 25.6,13.16 v1(26.32,13.16) ; 34.83,14.55 34.83,12.27 35.6,11.51 C3.1 ; 34.83,14.55 C47.1 ; C46.1 34,23.32 v1(33.49,22.81)
VCC5V: length 71.8
  TOP w0.254: TP6.1 53.5,39.54 51.22,41.83 U23.1
  TOP w1.016: U23.1 U21.1 v2(43.95,44.35)
  LAYER4 w0.635: v2(35.85,45.8) 43.95,45.8 v2(43.95,44.35)
  LAYER5 w0.635: v3(11.97,44.91) 10.45,44.91 10.45,46.95 11.2,47.7 13.37,47.7 14.39,48.72 17.05,48.72 19.09,46.68 35.85,46.68 v2(35.85,45.8)
  BOTTOM w0.254: 12.86,41.48 12.86,39.32 12.35,38.81 11.72,38.81 10.07,37.16 C101.1
  BOTTOM w0.356: U26.1 12.86,42.78 12.86,41.48 U26.3 ; v3(11.97,44.91) 11.04,43.98 U26.20 10.61,45 C98.1
  BOTTOM w0.635: v3(11.97,44.91) 12.86,44.02 12.86,42.78
VCC12V: length 115.8
  TOP w0.305: U14.1 16.32,49.64 16.32,49.63 ; v1(42.96,50.72) 42.96,49.64 U20.15 ; U14.20 16.33,50.84 16.32,50.83 ; U20.16 41.7,52.4 v1(43.29,52.4) ; U20.13 v1(44.21,48.34) ; U14.3 16.32,48.34
  TOP w1.016: v2(21.6,44.35) U17.1 U19.1 ; TP3.1 16.32,46.81 16.32,50.83
  LAYER3 w0.305: 41.82,52.4 v1(43.29,52.4) ; v1(44.21,48.34) 41.82,48.34 ; v1(42.96,50.72) 41.82,50.72
  LAYER3 w1.016: 41.82,52.4 41.82,41.86 21.6,41.86 v2(21.6,44.35)
  LAYER4 w1.016: v2(21.6,44.35) 21.6,46.81 TP3.1
  BOTTOM w0.254: C87.1 v1(43.29,52.4) ; C82.1 16.29,47.57 C83.1 ; C100.1 5.62,40.59 5.62,41.48 U26.13
  BOTTOM w0.356: U26.16 6.81,43.98 U26.15
  BOTTOM w0.381: 14.26,47.95 C82.1
  BOTTOM w0.508: 5.5,45.29 2.96,45.29 C100.1 ; 5.5,45.29 5.5,50.75 14.26,50.75 TP3.1 ; 5.5,45.29 6.81,43.98
VCC12VN: length 64.3
  TOP w0.305: U16.1 26.32,49.64 ; U16.20 26.32,50.84
  TOP w1.016: U15.1 U18.1 v2(38.36,44.35) ; 26.32,49.64 v2(26.32,52.02)
  LAYER3 w1.016: v2(26.32,52.02) 26.32,44.35 v2(26.35,44.35) v2(38.36,44.35)
  LAYER4 w0.381: TP4.1 16.67,51.51 25.82,51.51 v2(26.32,52.02)
  BOTTOM w0.254: R51.2 24.04,40.92 24.04,44.35 v2(26.35,44.35)
  BOTTOM w0.381: C79.1 31.4,44.35 v2(26.35,44.35) ; C81.1 28.23,50.24 C80.1
  BOTTOM w1.016: v2(26.32,52.02) C80.1
VDD1V2: length 142.7
  TOP w0.254: v1(27.28,14.49) 25.73,16.04 U13.24 ; v1(41.31,23.44) 41.31,24.84 39.09,27.06 U13.118 ; 45.63,15.54 46.82,15.54 47.53,16.26 v1(47.53,16.84) ; U22.12 v1(53.25,47.84) ; U22.11 52.49,47.34 v1(52.49,46.81) ; v1(37.07,9.91) 37.09,9.91 U13.59 37.09,5.63 v1(36.87,5.41) C56.1
  LAYER2 w0.254: v1(41.31,23.44) 41.31,27.76 43.98,30.43 49.69,30.43 50.55,29.57 56.9,29.57 TP7.1
  LAYER3 w0.381: 55.13,44.53 v1(51.6,44.53) ; 55.13,46.81 v1(52.49,46.81) ; v1(53.25,47.84) 55.13,47.84
  LAYER3 w0.762: 55.13,47.84 55.13,44.53 56.78,42.87 56.78,35.25 55.92,34.39 55.92,30.56 TP7.1
  LAYER4 w0.254: v1(19.59,15.7) 26.07,15.7 v1(27.28,14.49)
  LAYER4 w0.381: 37.07,14.17 27.59,14.17 v1(27.28,14.49)
  LAYER4 w0.508: v1(37.07,9.91) 37.07,15.14 47.53,15.14 v1(47.53,16.84)
  LAYER4 w0.762: TP7.1 57.44,16.84 v1(47.53,16.84)
  BOTTOM w0.254: R55.1 50.33,40.97 C95.1 v1(51.6,44.53) ; C58.1 v1(47.53,16.84) ; C55.1 v1(19.59,15.7)
  BOTTOM w0.305: v1(52.49,46.81) 54.26,45.03 C94.1
VDD3V3: length 432.3
  TOP w0.254: U13.49 v1(32.08,5.71) 29.59,5.71 28.58,6.71 U13.42 ; U12.2 v1(25.84,2.49) ; v1(52.49,49.86) 52.49,49.34 U22.15 ; U13.140 28.08,32.18 C62.1 v1(27.34,32.33) 27.29,32.28 C26.2 ; U13.117 39.59,28.02 42.09,28.02 U13.112 42.09,30.67 42.89,31.47 42.89,33.55 v1(42.4,34.04) ; v1(32.75,23.62) 34.08,24.96 U13.128 ; U12.3 v1(25.84,3.76) ; v1(48.42,23.19) 48.42,22.43 47.04,21.04 45.63,21.04 ; C53.1 v1(39.66,5.41) 39.09,5.98 U13.63 39.09,8.92 v1(40.07,9.91) 41.09,8.89 U13.67 41.09,6.55 42.23,5.41 v1(43.98,5.41) C54.1 ; U11.4 v1(5.12,13.92) ; U13.33 21.76,11.54 v1(20.46,10.24) ; 9.18,17.73 v1(7.66,17.73) ; v1(20.48,26.75) 21.18,26.05 U13.4 ; v1(42.02,14.33) 43.74,16.04 45.63,16.04 ; v1(30.58,33.78) 30.08,33.28 U13.136 ; U22.14 v1(53.25,48.84) ; 45.63,11.54 48.27,11.54 v1(48.55,11.25) ; U13.60 37.59,8.92 v1(38.57,9.91) ; 45.63,15.04 48.22,15.04 v1(48.55,15.37) ; U13.23 22.24,16.54 22.24,21.04 U13.14 ; v1(48.4,27.71) 46.73,26.05 45.63,26.05 ; 22.49,1.22 v1(24.52,1.22)
  TOP w0.381: 22.24,21.04 21.64,21.04 v1(20.51,22.17) ; v1(56.42,12.83) 53.25,12.83 51.67,11.25 Y1.4 v1(48.55,11.25)
  LAYER3 w0.254: v1(31.43,15.27) 31.38,15.32 23.91,15.32 ; 23.91,26.75 v1(20.48,26.75) ; v1(20.46,10.24) 23.91,10.24 ; v1(30.58,33.78) 30.58,31.19 ; v1(48.55,15.37) 43.06,15.37 v1(42.02,14.33) ; v1(48.42,23.19) 45.63,23.19 ; v1(37.57,33.78) 37.57,31.25 37.63,31.19 ; 32.04,8.58 32.08,8.54 v1(32.08,5.71) ; 27.34,31.19 v1(27.34,32.33)
  LAYER3 w0.381: 51.19,49.86 v1(52.49,49.86) ; v1(38.57,9.91) 38.57,8.58 ; 31.25,31.19 31.25,25.12 v1(32.75,23.62) ; 34.2,8.58 34.2,4.39 39.66,4.39 v1(39.66,5.41) ; v1(25.84,3.76) 27.21,3.76 27.21,8.58 ; v1(48.55,11.25) 45.63,11.25 ; J4.5 11.08,3.5 22.24,3.5 v1(24.52,1.22) ; v1(42.4,34.04) 42.96,33.48 42.96,31.19 ; v1(40.07,9.91) 40.07,8.58 ; v1(53.25,48.84) 51.19,48.84
  LAYER3 w0.508: v1(20.51,22.17) 23.91,22.17 ; 23.91,13.87 v1(22.57,13.87)
  LAYER3 w1.016: 47.15,31.19 47.15,40.36 49.46,42.67 49.46,45.31 51.19,47.04 51.19,49.86 ; 47.15,31.19 47.15,27.71 ; 47.15,31.19 25.64,31.19 25.64,26.75 23.91,26.75 23.91,9.98 27.21,9.98 27.21,8.58 45.63,8.58 45.63,27.71 47.15,27.71 ; 47.15,27.71 v1(48.4,27.71)
  BOTTOM w0.254: C66.1 44.61,14.68 44.49,14.81 42.5,14.81 v1(42.02,14.33) ; C51.1 v1(20.51,22.17) C70.1 ; C88.1 52.49,52.4 v1(52.49,49.86) ; v1(31.43,15.27) 31.53,15.16 U2.8 ; v1(31.43,15.27) 31.38,15.32 ; v1(31.43,15.27) 30.11,15.27 C7.2 ; C52.1 v1(20.48,26.75) C69.1 ; TP5.1 56.3,32.46 56.3,38.53 57.19,39.42 R53.1 58.2,40.97 58.2,47.44 54.65,47.44 ; 54.65,47.44 C89.1 ; 54.65,47.44 v1(53.25,48.84) ; C97.2 v1(56.42,12.83) ; v1(7.66,17.73) 5.12,15.19 v1(5.12,13.92) ; v1(32.75,23.62) U9.12 32.75,27.89 C38.2 ; C74.1 v1(20.46,10.24) C67.1 ; C68.1 50.2,19.63 50.71,19.13 52.23,19.13 53.76,17.6 U25.8 ; U8.16 v1(37.57,33.78) ; C17.2 41.03,15.32 v1(42.02,14.33) ; 47.53,27.71 v1(48.4,27.71) 49.31,27.71 C72.1 ; 47.53,27.71 46.98,27.71 45.42,26.16 U10.12 43.92,27.34 43.37,27.89 C44.2 ; 47.53,27.71 C65.1 ; v1(42.02,14.33) 42,14.3 U3.8 ; v1(24.52,1.22) 21.75,1.22 20.74,2.23 20.74,3.12 19.97,3.89 C49.2 ; U5.16 v1(30.58,33.78) ; C63.1 v1(48.42,23.19) C61.1 ; C60.2 v1(48.55,15.37)
  BOTTOM w0.381: R49.2 48.04,10.74 v1(48.55,11.25) ; v1(22.57,13.87) 21.63,14.81 C71.1 20.51,15.67 20.51,19.18 ; v1(24.52,1.22) 25.84,1.22 v1(25.84,2.49) v1(25.84,3.76) ; v1(7.66,17.73) 7.78,17.86 C50.1 11.97,18.11 17.77,18.11 18.83,19.18 R46.2 20.51,19.18 ; R47.2 20.51,19.18 ; U25.8 53.91,12.83 v1(56.42,12.83)
VDD5V: length 40.1
  TOP w0.254: U22.6 45.76,46.34 ; U22.2 45.76,48.84 ; U22.1 45.76,49.34 ; 35.85,50.84 U20.20 ; U22.20 45.76,50.34 ; U22.4 45.76,47.84 ; 35.85,48.34 U20.3 ; U22.5 45.76,47.34 ; 35.85,49.64 U20.1
  TOP w1.016: 45.76,50.75 v2(45.76,46.25) ; v2(35.85,47.95) 35.85,50.84
  BOTTOM w0.762: v2(45.76,46.25) 45.76,46.18 37.88,46.18 C92.1 35.85,47.57 v2(35.85,47.95)
  BOTTOM w1.016: C86.1 v2(45.76,46.25)
CFG0: length 6.1
  TOP w0.254: v1(19.59,16.59) 19.72,16.46 20.23,16.46 21.65,15.04 U13.26
  BOTTOM w0.254: R46.1 v1(19.59,16.59)
CLK_20M: length 7.5
  TOP w0.254: Y1.3 50.43,14.37 48.59,12.54 45.63,12.54
DONE: length 9.3
  TOP w0.254: D1.2 49.72,7.44 v1(48.96,8.2) 48.75,8 U13.72
  BOTTOM w0.254: R49.1 v1(48.96,8.2)
FPGA_RX1: length 78.9
  TOP w0.254: v1(7.15,4.77) 17.82,4.77 19.85,6.81 26.21,6.81 26.58,7.18 U13.38
  LAYER3 w0.254: v1(7.15,4.77) 5.12,4.77 0.54,9.35 0.54,43 4.1,46.56 8.16,46.56 8.8,47.19 8.8,50.88 J5.2
FPGA_RX2: length 77
  TOP w0.254: U13.40 27.6,7.98 27.6,6.81 26.58,5.79 20.36,5.79 17.82,3.25 v1(6.77,3.25)
  LAYER4 w0.254: v1(6.77,3.25) 6.64,3.25 1.69,8.2 1.69,44.07 5.19,47.57 8.42,47.57 J6.2
FPGA_TX1: length 77.8
  TOP w0.254: U13.37 25.23,8 24.55,7.31 19.59,7.31 17.69,5.41 12.23,5.41 v1(11.72,5.92)
  LAYER3 w0.254: v1(11.72,5.92) 4.86,5.92 1.18,9.6 1.18,42.49 4.48,45.8 9.31,45.8 11.36,47.85 11.36,50.9 J5.3
FPGA_TX2: length 76.8
  TOP w0.254: v1(7.91,4.01) 17.82,4.01 20.1,6.3 26.38,6.3 27.06,6.98 27.06,7.98 U13.39
  LAYER4 w0.254: v1(7.91,4.01) 6.77,4.01 2.19,8.58 2.19,43.64 5.62,47.07 10.45,47.07 J6.3
JTAG_TCK: length 40.8
  TOP w0.254: 45.63,14.04 v1(43.99,14.04)
  LAYER4 w0.254: J4.4 13.24,3.12 15.53,3.12 20.23,7.82 27.98,7.82 28.86,8.71 40.68,8.71 42.07,10.11 42.07,13.03 43.08,14.04 v1(43.99,14.04)
JTAG_TDI: length 39.7
  TOP w0.254: 45.63,13.54 44.49,13.54 43.99,13.04 v1(43.22,13.04)
  LAYER4 w0.254: v1(43.22,13.04) 44.22,13.04 44.99,12.27 44.99,8.97 43.6,7.57 29.63,7.57 28.86,6.81 21.24,6.81 16.8,2.36 J4.2
JTAG_TDO: length 41.7
  TOP w0.254: 45.63,14.54 v1(49.3,14.54)
  LAYER4 w0.254: v1(49.3,14.54) 49.3,13.52 45.63,9.85 45.63,8.71 43.98,7.06 29.88,7.06 29.12,6.3 21.63,6.3 19.34,4.01 J4.1
JTAG_TMS: length 56.3
  TOP w0.254: v1(44,12.04) 44,12.29 44.75,13.04 45.63,13.04
  LAYER2 w0.254: v1(49.57,1.85) 42.71,1.85 42.71,12.04 v1(44,12.04)
  LAYER4 w0.254: J4.3 14.89,1.6 20.61,7.31 28.36,7.31 29.25,8.2 41.06,8.2 44,11.15 v1(44,12.04)
  BOTTOM w0.254: R48.2 v1(49.57,1.85)
TEMP_CS: length 10
  TOP w0.254: v1(52.49,14.71) 51.45,14.71 48.78,12.04 45.63,12.04
  BOTTOM w0.254: U25.7 v1(52.49,14.71)
TEMP_DATA: length 10.9
  TOP w0.254: 45.63,10.54 48.33,10.54 48.98,9.88 51.6,9.88 51.93,10.21 52.87,10.21 v1(53.76,9.32)
  BOTTOM w0.254: U25.1 v1(53.76,9.32)
TEMP_SCK: length 9.2
  TOP w0.254: v1(52.49,9.32) 48.7,9.32 47.99,10.04 45.63,10.04
  BOTTOM w0.254: U25.2 v1(52.49,9.32)
TOE: length 4.2
  TOP w0.254: v1(21.37,16.59) 21.37,16.46 22.29,15.54 U13.25
  BOTTOM w0.254: R47.1 v1(21.37,16.59)
VAA5V: length 32.9
  TOP w0.381: v1(42.45,35) 43.95,35 U21.3
  BOTTOM w0.254: U5.2 31.23,38.94 28.36,38.94 C25.2 ; U8.2 38.22,39.04 35.85,39.04 C35.2
  BOTTOM w0.305: U5.2 31.23,34.62 ; U8.2 38.22,35
  BOTTOM w0.381: 31.23,34.62 37.84,34.62 38.22,35 v1(42.45,35)
VAA12VN: length 44
  TOP w0.381: C27.2 24.6,32.28 v1(24.6,33.22) ; v1(48.73,33.35) 48.73,32.33 C33.2
  TOP w0.508: U15.3 32.78,37.11 29.25,37.11 v1(29.25,35)
  LAYER4 w0.381: v1(48.73,33.35) 48.73,31.95 29.25,31.95 v1(29.25,35) 29.12,34.87 26.38,34.87 26.38,33.22 v1(24.6,33.22)
  BOTTOM w0.381: U6.5 v1(24.6,33.22) ; U7.5 v1(48.73,33.35)
VAA12VP: length 78.5
  TOP w0.254: C34.2 43.72,31.32 v1(45.76,29.29)
  TOP w0.381: C28.2 20.86,29.67
  TOP w1.016: v2(23.78,29.67) 19.21,29.67 19.21,37.57 U17.3
  LAYER2 w0.508: v2(23.78,29.67) 23.78,28.4 18.58,23.19 J1.9
  LAYER4 w1.016: v2(23.78,29.67) 24.93,30.81 45.76,30.81 ; v1(45.76,29.29) 45.76,30.81 ; 45.76,30.81 J2.9
  BOTTOM w0.254: v1(45.76,29.29) 44.92,30.12 U7.8
  BOTTOM w0.381: U6.8 20.79,29.67 v2(23.78,29.67)
VPP: length 134.5
  TOP w0.305: v1(23.44,50.72) 23.44,49.69 U14.15 ; U14.16 22.18,52.4 v1(23.78,52.4) ; U14.13 v1(24.68,48.34)
  TOP w1.016: J1.2 J1.1 ; J2.1 J2.2
  LAYER2 w1.016: J1.2 J1.1
  LAYER3 w0.254: TP1.1 19.21,44.78
  LAYER3 w0.381: v1(24.68,48.34) 22.34,48.34 ; v1(23.44,50.72) 22.34,50.72 ; v1(23.78,52.4) 22.34,52.4
  LAYER3 w1.016: J3.15 19.21,24.46 19.21,46.81 22.34,46.81 22.34,52.45
  LAYER4 w0.635: 14.26,20.52 J3.20 13.12,19.38 ; 16.8,23.32 J3.15 16.8,25.6 ; J3.18 14.26,23.06 ; J3.18 13.12,21.92 ; J3.18 14.26,20.78 ; J3.16 14.26,25.6 ; J3.16 14.26,23.32 ; J3.16 13.12,24.46 ; 51.46,21.79 J2.1 51.46,19.51 ; J2.2 55.14,20.65 ; J2.2 54,21.79 ; J2.2 54,19.51 ; 16.8,23.06 J3.17 16.8,20.78
  LAYER4 w1.524: 18.83,19.38 J3.19 J3.20 ; 18.58,24.46 J3.15 J3.16 ; 18.7,21.92 J3.17 J3.18 ; 49.06,20.65 J2.1 J2.2
  LAYER5 w0.508: J3.15 17.94,24.46 ; J3.15 16.8,23.32 ; J3.15 16.8,25.6 ; 14.26,25.6 J3.16 14.26,23.32 ; 17.94,19.38 J3.19 16.8,20.52 ; J1.2 5,34.49 ; J1.2 5,32.21 ; J1.2 3.86,33.35 ; 14.26,20.78 J3.18 14.26,23.06 ; 7.54,34.49 J1.1 7.54,32.21 ; J3.17 16.8,23.06 ; J3.17 17.94,21.92 ; J3.17 16.8,20.78
  LAYER5 w1.016: J3.16 J3.15 ; J2.2 J2.1 ; J3.20 J3.19 ; J3.18 J3.17
  LAYER5 w1.524: 12.23,24.46 J3.16 ; J1.2 J1.1 9.69,33.35 ; 12.1,21.92 J3.18 ; 11.72,19.38 J3.20
  BOTTOM w0.305: C77.1 v1(23.78,52.4)
VPP5V: length 69.2
  TOP w0.762: U23.3 49.79,37.32 v1(49.79,35.25)
  LAYER3 w0.508: v1(35.6,6.3) 35.6,7.31 46.01,7.31 v1(46.01,6.17)
  LAYER3 w0.762: 46.01,7.31 51.22,7.31 51.22,16.84 49.82,16.84 49.82,35.23 v1(49.79,35.25)
  BOTTOM w0.254: C13.2 45.83,7.39 C15.2 ; U3.1 42,4.7 43.47,6.17 v1(46.01,6.17) ; U2.1 31.53,3.89 33.56,5.92 C5.2 35.42,7.39 C3.2
  BOTTOM w0.381: C13.2 v1(46.01,6.17) ; C3.2 v1(35.6,6.3)
VPP12VN: length 43.5
  TOP w0.508: U18.3 36.36,37.57 v1(36.36,33.1)
  LAYER2 w0.508: v1(36.36,33.1) v2(36.36,21.41)
  LAYER3 w0.381: v2(36.36,21.41) 31.48,16.54 v1(28.48,16.54)
  BOTTOM w0.305: C47.2 U10.24 35.02,18.42 C48.2 ; C42.2 23.84,18.41 24.39,18.41 24.4,18.42 U9.24 C41.2
  BOTTOM w0.381: v1(28.48,16.54) 27.26,16.54 26.86,16.13 C41.2
  BOTTOM w0.508: C48.2 34.83,19.89 v2(36.36,21.41)
VPP12VP: length 44.2
  TOP w0.254: v2(27.19,35.92) 27.19,36.02
  TOP w1.016: 27.19,36.02 U19.3
  LAYER2 w0.508: v2(27.19,35.92) 25.94,35.92 25.94,31.19 34.83,31.19 v1(34.83,27.63)
  BOTTOM w0.254: v1(34.83,27.63) 34.83,29.54 C45.2
  BOTTOM w0.381: U9.1 24.22,26.16 C40.2 23.66,27.81 25.39,29.54 C39.2 25.51,30.43 26.27,31.19 28.36,31.19 28.36,34.75 v2(27.19,35.92) ; U10.1 35.39,26.16 C46.2 v1(34.83,27.63)
VPPN: length 147.4
  TOP w0.305: U16.15 33.2,49.64 v1(33.2,50.72) ; U16.13 v1(34.44,48.34) ; v1(33.64,52.4) 31.94,52.4 U16.16
  TOP w1.016: J1.6 J1.5 ; J2.5 J2.6
  LAYER2 w1.016: J1.6 J1.5 ; J2.5 J2.6
  LAYER3 w1.016: J3.1 J3.3 J3.5
  LAYER4 w0.381: v1(33.2,50.72) 32.04,50.72 ; v1(34.44,48.34) 32.04,48.34 ; v1(33.64,52.4) 32.04,52.4
  LAYER4 w0.635: 15.66,39.7 J3.3 ; J3.3 17.94,39.7 ; J3.3 16.8,40.84 ; J3.3 16.8,38.56 ; J3.4 15.4,39.7 ; J3.4 14.26,40.84 ; J3.4 13.12,39.7 ; J3.4 14.26,38.56 ; J1.6 5,29.41 ; J1.6 3.86,28.27 ; J1.6 5,27.13 ; 14.26,36.02 J3.6 ; J3.6 14.26,38.3 ; J3.6 15.4,37.16 ; J3.6 13.12,37.16 ; 7.54,29.41 J1.5 7.54,27.13 ; 13.12,42.24 J3.2 ; J3.2 14.26,41.1 ; J3.2 15.4,42.24 ; J3.2 14.26,43.38 ; 15.66,42.24 J3.1 ; J3.1 16.8,41.1 ; J3.1 16.8,43.38 ; J3.5 16.8,38.3 ; J3.5 15.66,37.16 ; J3.5 17.94,37.16 ; J3.5 16.8,36.02
  LAYER4 w1.016: 32.04,52.4 32.04,42.24 J3.1
  LAYER4 w1.524: 9.69,28.27 J1.5 J1.6 ; J2.6 J2.5 25.18,25.73 19.09,31.83 19.09,36.65
  LAYER5 w1.016: J3.6 J3.5 ; J3.4 J3.3 ; J1.6 J1.5 ; J2.5 J2.6 ; J3.2 J3.1
  BOTTOM w0.254: TP2.1 J3.2
  BOTTOM w0.305: C78.1 v1(33.64,52.4)
X_POS: length 11.6
  BOTTOM w0.254: U6.7 22.06,33.36 23.56,34.85 24.42,34.85 25.69,36.12 25.69,38.68 24.93,39.45 R31.1
X_POS1: length 36.2
  BOTTOM w0.254: U6.1 20.13,37.06 19.21,36.14 19.21,34.49 18.07,33.35 13.5,33.35 9.69,29.54 4.1,29.54 2.83,28.27 2.83,20.52 4.23,19.13 6.02,19.13 J1.11
X_POS2: length 32.5
  BOTTOM w0.254: J1.12 3.59,22.06 3.59,26.36 4.23,27 8.93,27 12.74,30.81 17.56,30.81 20.99,34.24 22.01,34.24 23.18,35.41 24.19,35.41 24.6,35.82 U6.4
XCUR_SAMP: length 8.5
  BOTTOM w0.254: R4.1 11.72,23.57 10.83,24.46 6.27,24.46 J1.8
XDAC_CS: length 11.6
  TOP w0.254: v1(28.2,21.35) 28.2,25 27.08,26.12 U13.142
  BOTTOM w0.254: U9.20 v1(28.2,21.35)
XDAC_LDAC: length 14.2
  TOP w0.254: v1(30.15,22.22) 30.01,22.36 30.01,25.68 29.58,26.11 U13.137
  BOTTOM w0.254: 30.15,19.42 v1(30.15,22.22) 30.15,22.22 U9.17
XDAC_RST: length 12.1
  TOP w0.254: U13.134 31.08,26.31 32.04,25.35 32.04,21.94 v1(31.45,21.35)
  BOTTOM w0.254: v1(31.45,21.35) 30.8,20.7 U9.16
XDAC_RSTSEL: length 11.5
  TOP w0.254: U13.144 26.08,25.6 26.9,24.78 v1(26.9,21.35)
  BOTTOM w0.254: U9.22 v1(26.9,21.35)
XDAC_SCK: length 11.6
  TOP w0.254: v1(27.55,22.22) 27.55,24.89 26.58,25.86 U13.143
  BOTTOM w0.254: U9.21 v1(27.55,22.22)
XDAC_SDI: length 13.3
  TOP w0.254: U13.138 29.08,25.82 29.48,25.42 29.48,21.36 v1(29.5,21.35)
  BOTTOM w0.254: 29.5,19.42 v1(29.5,21.35) U9.18
XDAC_SDO: length 14.5
  TOP w0.254: U13.141 27.58,26.38 28.85,25.11 v1(28.85,22.22)
  BOTTOM w0.254: 28.85,19.42 v1(28.85,22.22) 28.85,22.22 U9.19
XIADC_CLKIN: length 12.2
  TOP w0.254: v1(30.25,11.15) 30.25,13.42 25.13,18.54 U13.19
  BOTTOM w0.254: v1(30.25,11.15) 30.25,12.71 U2.7
XIADC_MDAT: length 10.7
  TOP w0.254: U13.21 25.24,17.54 28.98,13.8 v1(28.98,11.15)
  BOTTOM w0.254: U2.6 28.98,12.71 v1(28.98,11.15)
XMOTOR_DRV: length 32.7
  BOTTOM w0.254: 30.15,24.21 29.41,23.47 27.49,23.47 25.41,21.39 22.92,21.39 22.31,22 22.31,24.41 21.52,25.2 18.15,25.2 17.61,25.73 J1.7 ; 30.15,24.21 31.81,24.21 32.1,24.49 U9.11 ; 30.15,24.21 U9.8
XPADC_CS: length 5.3
  TOP w0.254: U13.127 34.58,31.06 33.82,31.83 33.82,33 v1(33.84,33.02)
  BOTTOM w0.254: U5.11 v1(33.84,33.02)
XPADC_RST: length 5.3
  TOP w0.254: v1(35.14,33.02) 35.14,32.03 36.08,31.08 U13.124
  BOTTOM w0.254: U5.9 v1(35.14,33.02)
XPADC_RVS: length 5.3
  TOP w0.254: v1(31.23,33.02) 31.23,31.47 32.08,30.63 U13.132
  BOTTOM w0.254: U5.15 v1(31.23,33.02)
XPADC_SCK: length 6.6
  TOP w0.254: U13.129 33.58,31.17 33.18,31.57 33.18,33.78 v1(33.19,33.78)
  BOTTOM w0.254: U5.12 v1(33.19,33.78)
XPADC_SDI: length 6.9
  TOP w0.254: U13.125 35.58,30.82 34.5,31.91 34.5,33.77 v1(34.49,33.78)
  BOTTOM w0.254: U5.10 v1(34.49,33.78)
XPADC_SDO0: length 5.2
  TOP w0.254: U13.130 33.08,30.99 32.53,31.54 v1(32.53,33.02)
  BOTTOM w0.254: U5.13 v1(32.53,33.02)
XPADC_SDO1: length 6.8
  TOP w0.254: v1(31.88,33.78) 31.88,31.51 32.58,30.81 U13.131
  BOTTOM w0.254: U5.14 v1(31.88,33.78)
XY_CLK: length 27.2
  TOP w0.254: U11.13 7.15,13.92 6.64,13.41 6.64,8.46 7.4,7.7 10.32,7.7 13.12,10.49 19.47,10.49 21.01,12.04 U13.32
XY_CLK+: length 19
  TOP w0.254: U11.14 v1(7.66,15.19)
  BOTTOM w0.254: J3.29 15.53,5.41 13.37,5.41 11.85,6.93 11.85,13.41 10.2,15.06 R45.1 7.78,15.06 v1(7.66,15.19)
XY_CLK-: length 16.2
  TOP w0.254: U11.15 v1(7.66,16.46)
  BOTTOM w0.254: J3.30 12.99,6.68 12.48,7.19 12.48,13.79 9.64,16.64 R45.2 7.83,16.64 v1(7.66,16.46)
XY_STATUS: length 7.8
  TOP w0.254: U12.4 v1(25.77,5.03) ; v1(24.04,8.84) U13.36
  BOTTOM w0.254: v1(25.77,5.03) 24.04,6.76 v1(24.04,8.84)
XY_STATUS+: length 24
  TOP w0.254: U12.6 v1(24.52,3.76)
  BOTTOM w0.254: J3.21 17.05,16.84 18.65,15.24 18.65,7.59 19.47,6.78 20.28,6.78 20.66,6.4 21.35,7.08 21.71,6.72 21.02,6.04 21.38,5.68 22.07,6.37 22.43,6.01 21.74,5.32 22.39,4.67 R44.1 22.51,3.76 v1(24.52,3.76)
XY_STATUS-: length 23.6
  TOP w0.254: U12.7 v1(24.52,2.49)
  BOTTOM w0.254: v1(24.52,2.49) 22.57,2.49 R44.2 21.75,2.31 21.37,2.69 21.37,4.11 18.15,7.34 18.15,14.86 17.43,15.57 15.53,15.57 J3.22
XY_SYNC: length 29.4
  TOP w0.254: U11.3 5.12,15.19 6,14.3 6,8.08 7.02,7.06 10.7,7.06 11.59,7.95 21.5,7.95 22.01,8.46 22.01,9.35 23.2,10.54 U13.35
XY_SYNC+: length 17.8
  TOP w0.254: U11.2 v1(5.12,16.46)
  LAYER4 w0.254: v1(5.12,16.46) 7.4,14.17 10.07,14.17 13.75,10.49 14.89,10.49 16.16,9.22 J3.27
  BOTTOM w0.254: v1(5.12,16.46) 4.99,16.33 R41.1
XY_SYNC-: length 17.7
  TOP w0.254: 3.59,17.73 v1(5.12,17.73)
  LAYER4 w0.254: v1(5.12,17.73) 4.48,17.09 4.48,16.08 6.89,13.66 9.81,13.66 J3.28
  BOTTOM w0.254: R41.2 4.94,17.91 v1(5.12,17.73)
XY_X: length 33.2
  TOP w0.254: U11.5 2.32,12.65 1.81,13.16 1.81,18.11 2.7,19 11.08,19 11.97,18.11 18.07,18.11 18.7,17.47 18.7,15.44 20.1,14.05 20.69,14.05 21.69,13.04 U13.30
XY_X+: length 20.5
  TOP w0.254: U11.6 v1(5.12,11.38)
  LAYER3 w0.254: v1(5.12,11.38) 6.51,9.98 6.51,8.58 7.27,7.82 9.43,7.82 12.48,10.87 12.48,12.14 13.37,13.03 15.53,13.03 J3.25
  BOTTOM w0.254: R42.1 4.99,11.51 v1(5.12,11.38)
XY_X-: length 15.8
  TOP w0.254: U11.7 v1(5.12,10.11)
  LAYER3 w0.254: v1(5.12,10.11) 6,9.22 6,8.33 7.02,7.31 9.69,7.31 14.13,11.76 J3.26
  BOTTOM w0.254: v1(5.12,10.11) 4.94,9.93 R42.2
XY_Y: length 16.2
  TOP w0.254: U11.11 11.59,11.38 13.24,13.03 17.43,13.03 18.51,11.95 20.17,11.95 20.75,12.54 U13.31
XY_Y+: length 17
  TOP w0.254: U11.10 v1(7.66,10.11)
  LAYER3 w0.254: v1(7.66,10.11) 9.05,10.11 9.69,10.74 9.69,14.17 11.08,15.57 15.53,15.57 J3.23
  BOTTOM w0.254: v1(7.66,10.11) 7.78,10.24 R43.1
XY_Y-: length 13.8
  TOP w0.254: U11.9 v1(7.66,8.84)
  LAYER3 w0.254: J3.24 10.96,14.3 10.2,13.54 10.2,10.49 8.54,8.84 v1(7.66,8.84)
  BOTTOM w0.254: R43.2 7.83,8.66 v1(7.66,8.84)
Y_POS: length 10.8
  BOTTOM w0.254: R34.1 45.25,39.45 43.85,38.05 43.85,36.07 46.19,33.72 U7.7
Y_POS1: length 8.7
  BOTTOM w0.254: J2.11 50.63,33.35 48.58,35.41 45.43,35.41 44.92,35.91 U7.1
Y_POS2: length 6.8
  BOTTOM w0.254: U7.4 50.29,37.06 J2.12
YCUR_SAMP: length 4.3
  BOTTOM w0.254: J2.8 56.03,26.24 R13.1
YDAC_CS: length 9.4
  TOP w0.254: 45.63,19.54 42.21,19.54 39.66,17 v1(39.66,16.59)
  BOTTOM w0.254: U10.20 39.37,16.88 v1(39.66,16.59)
YDAC_LDAC: length 6.1
  TOP w0.254: 45.63,19.04 43.01,19.04 v1(41.31,17.35)
  BOTTOM w0.254: v1(41.31,17.35) 41.31,17.45 41.32,17.45 U10.17
YDAC_RST: length 7.8
  TOP w0.254: v1(41.95,15.95) 41.95,16.84 43.65,18.54 45.63,18.54
  BOTTOM w0.254: v1(41.95,15.95) 41.97,15.97 U10.16
YDAC_RSTSEL: length 10.9
  TOP w0.254: 45.63,20.04 41.41,20.04 38.26,16.9 v1(38.26,16.59)
  BOTTOM w0.254: U10.22 38.07,16.78 v1(38.26,16.59)
YDAC_SCK: length 10.4
  TOP w0.254: 45.63,20.54 39.72,20.54 v1(38.73,21.54)
  BOTTOM w0.254: U10.21 38.72,21.53 v1(38.73,21.54)
YDAC_SDI: length 7.5
  TOP w0.254: v1(41.31,21.23) 41.62,21.54 45.63,21.54
  BOTTOM w0.254: U10.18 40.67,19.63 40.68,19.63 40.68,20.6 v1(41.31,21.23)
